# Altium PCB fpga_board.PcbDoc (part 1 of 2)
Units mm, origin at the board's own origin, x right, y up, seen from the top; angles counter-clockwise.
Board outline 101.98 x 59.94 mm, 4 copper layers (Top Layer, Int1 (GND), Int2 (PWR), Bottom Layer), stack 1.565 mm thick; 79 components, 84 nets, 394 pads, 144 vias.
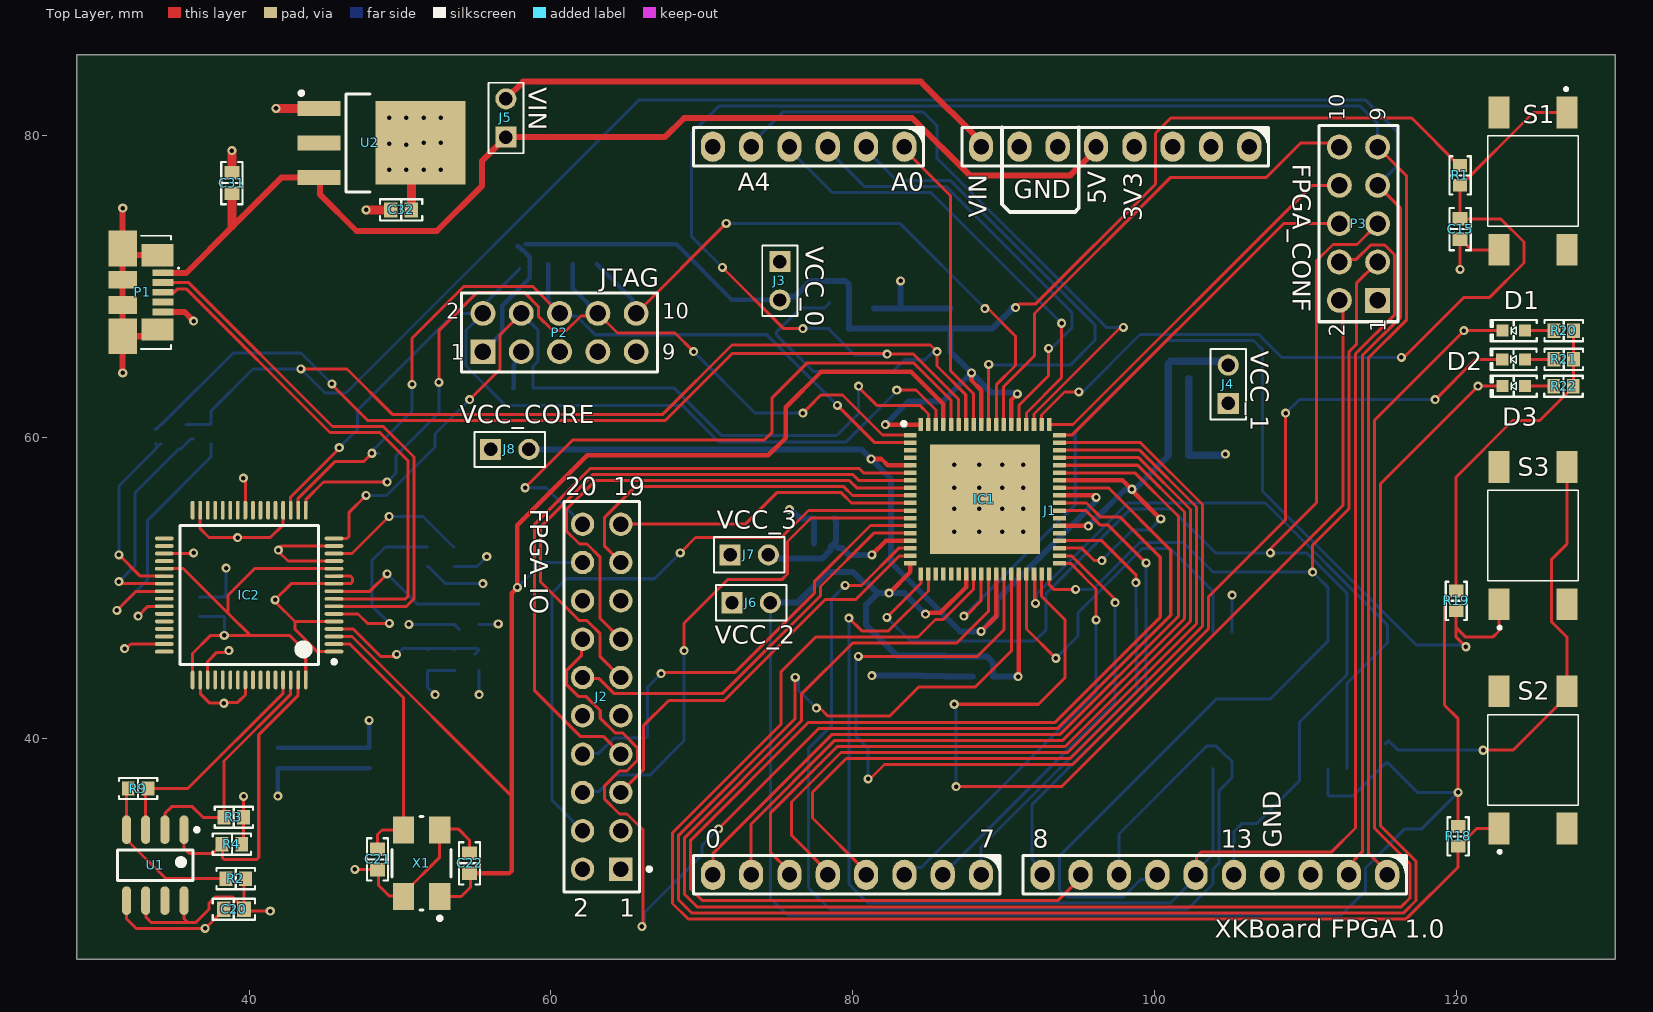
[diagram p0: Top Layer view]
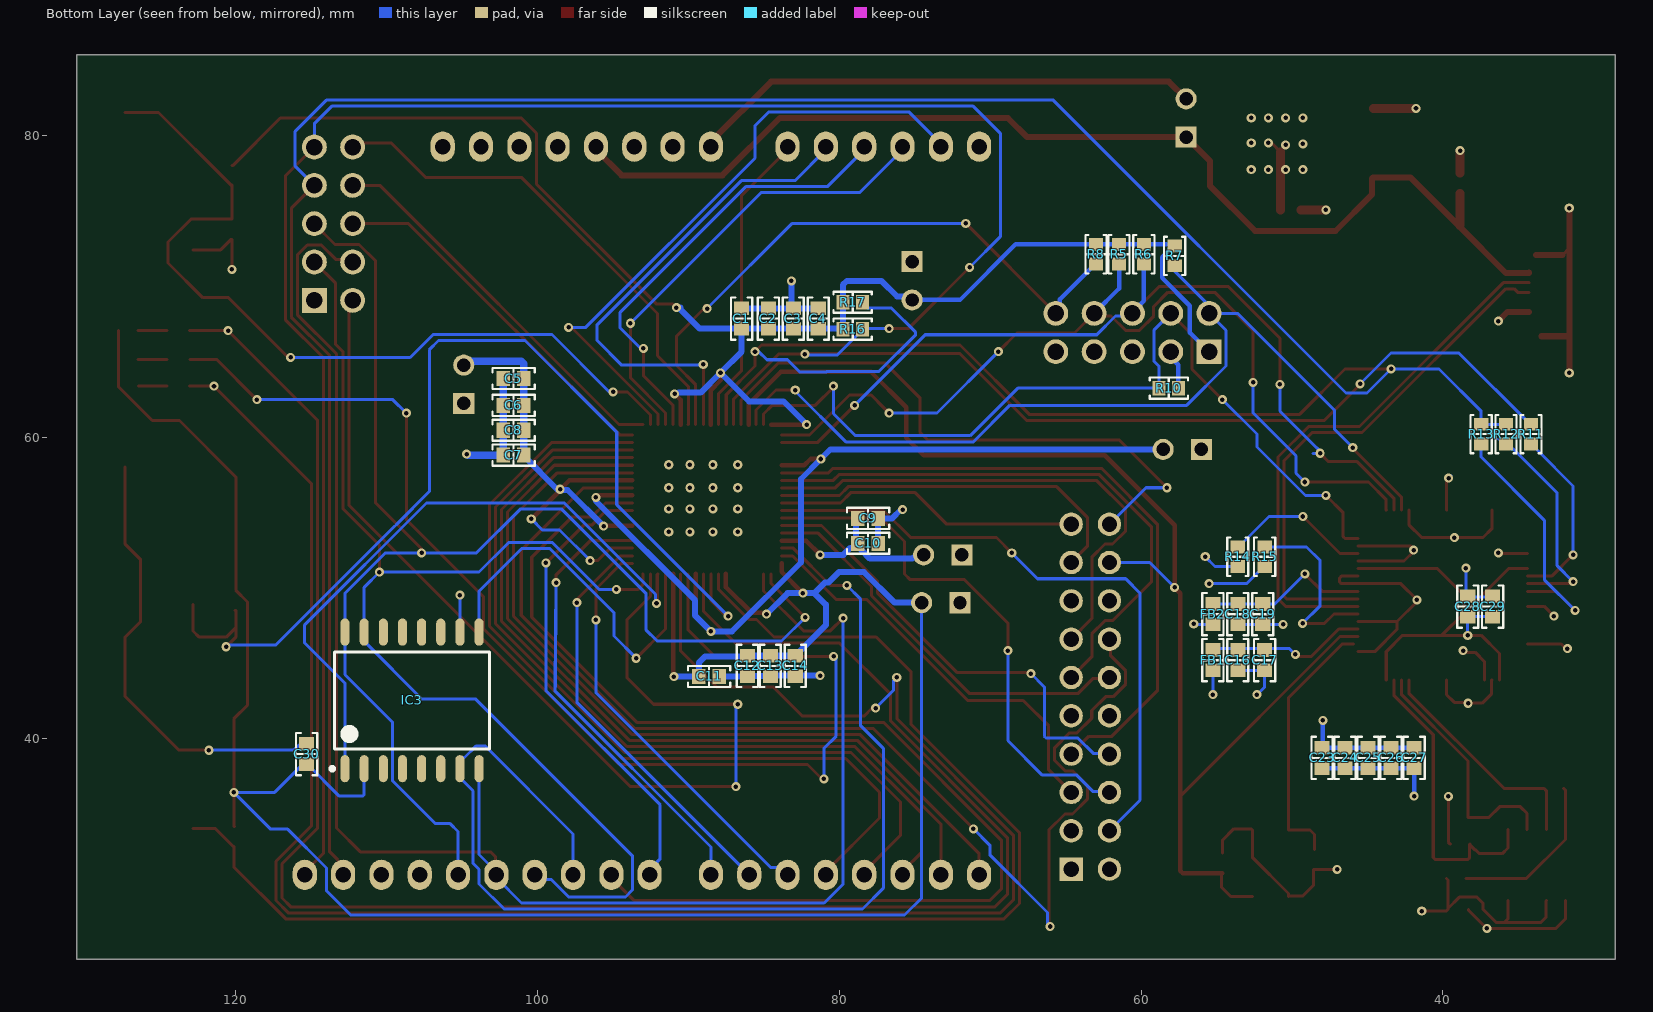
[diagram p1: Bottom Layer view, seen from below]
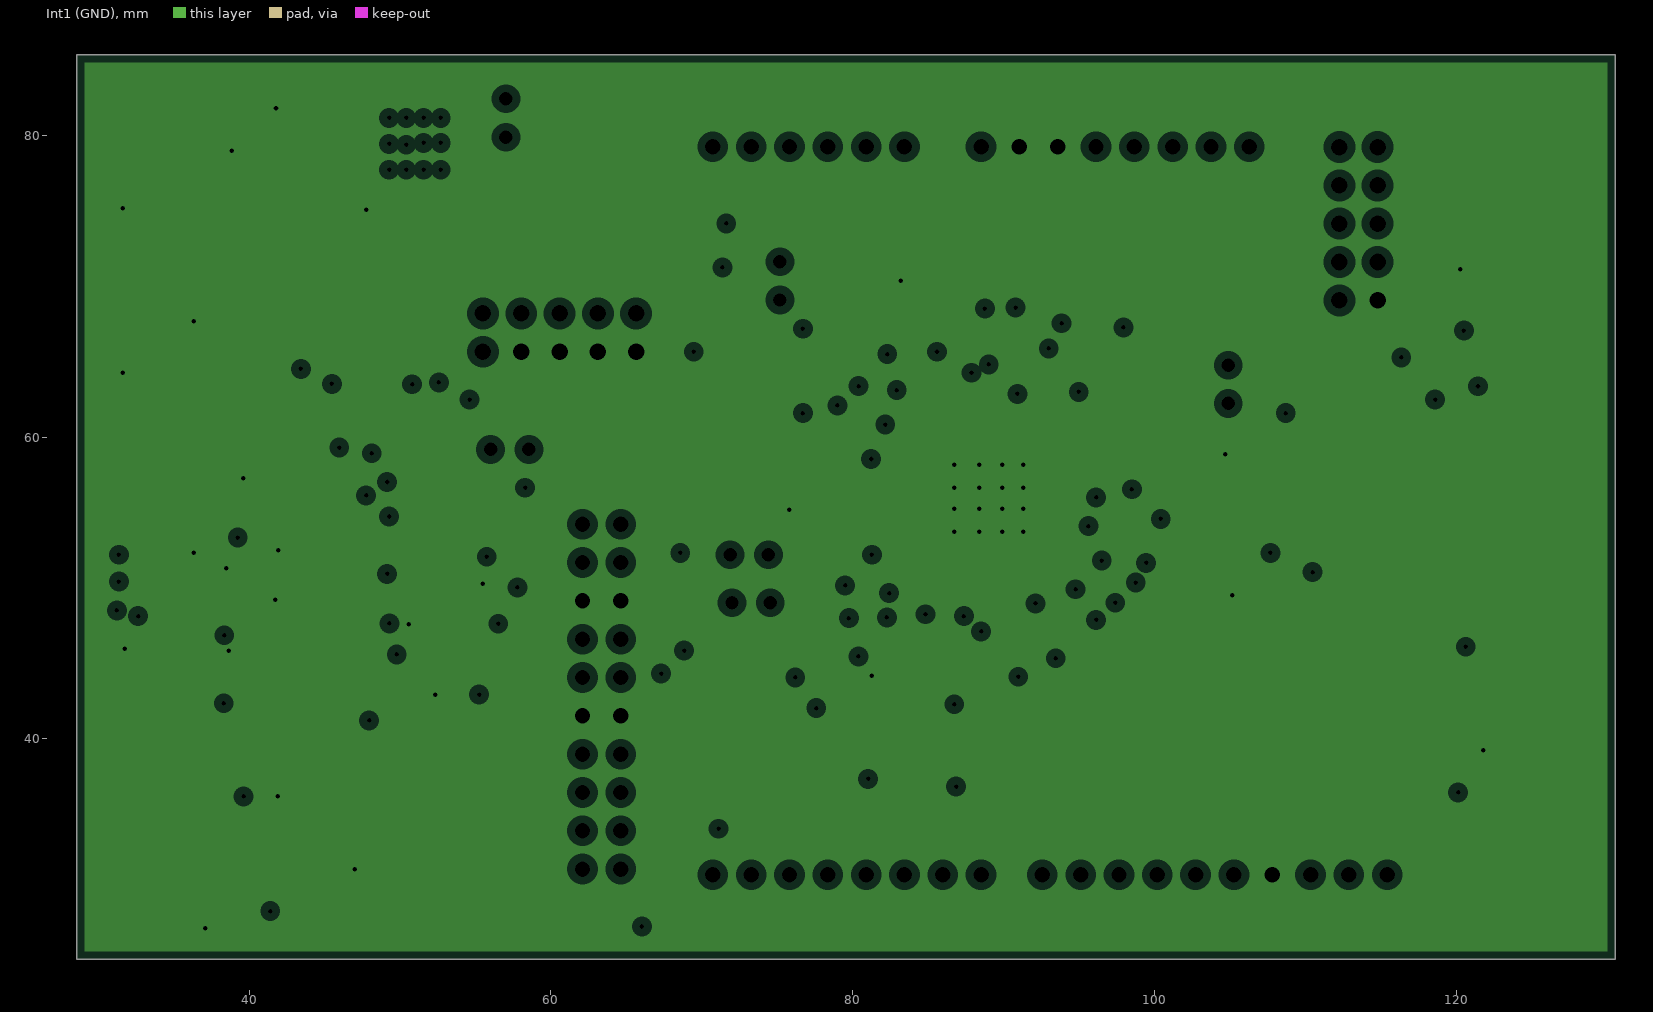
[diagram p2: Int1 (GND), clearances drawn from the general rule]
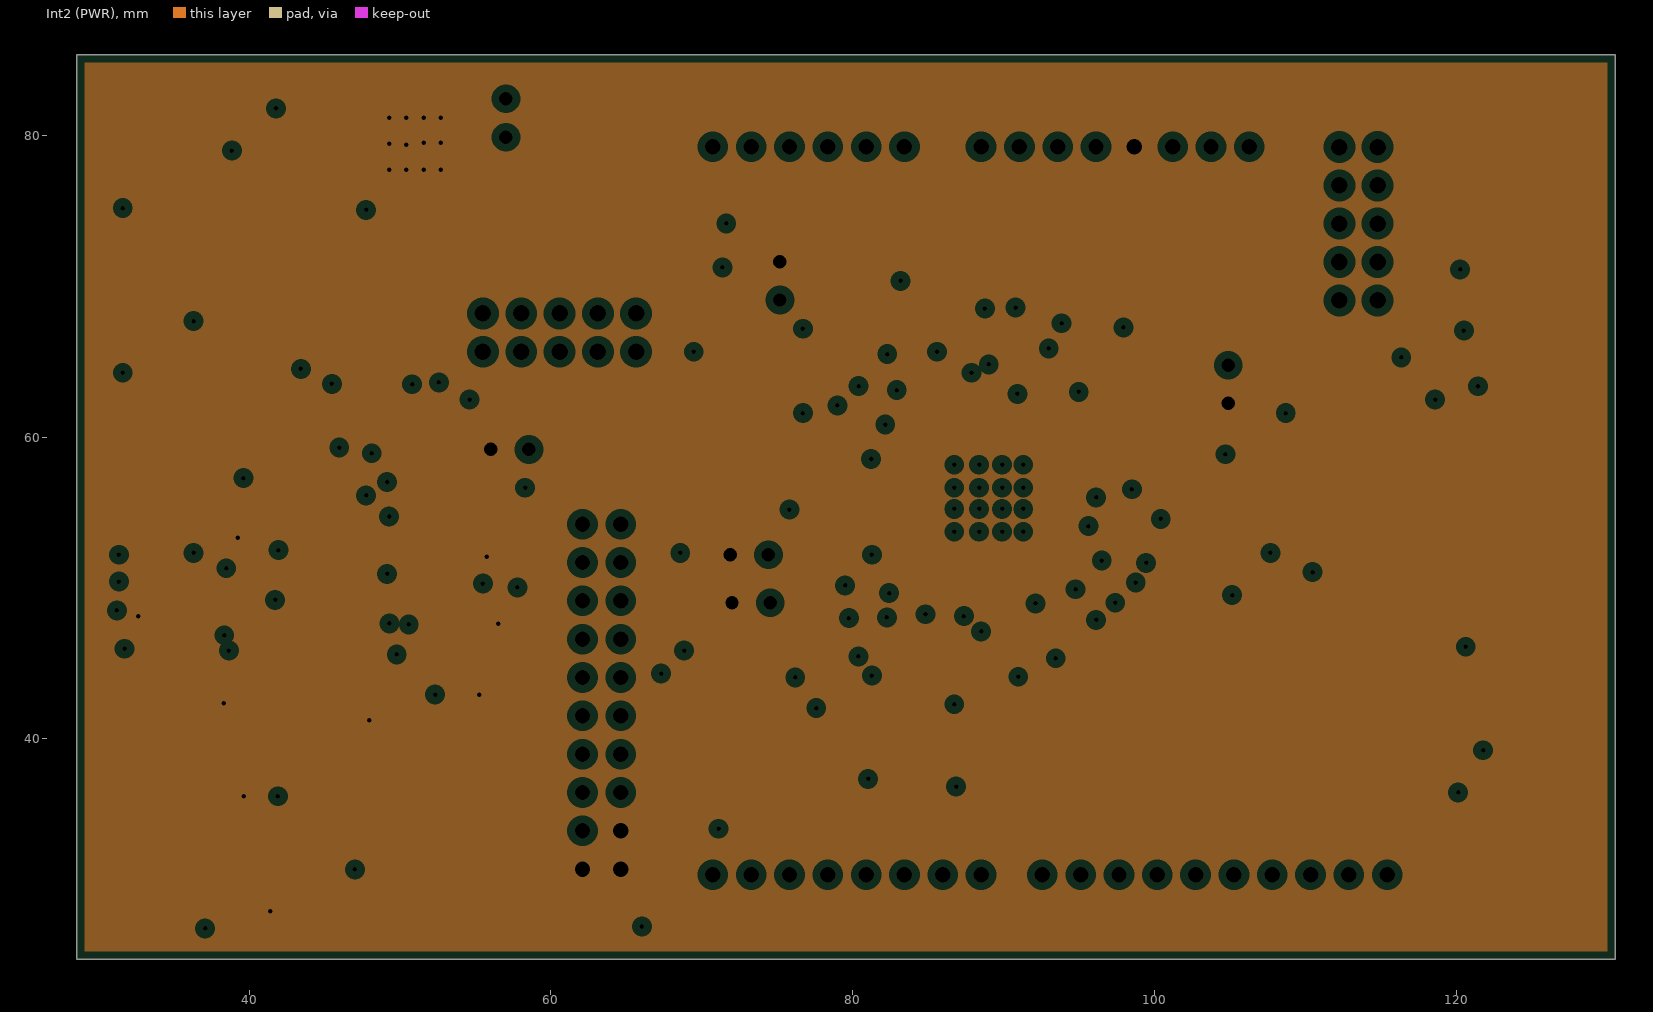
[diagram p3: Int2 (PWR), clearances drawn from the general rule]

## Layer stack, top to bottom
Top Solder: solder mask 0.0254, SM-001, Dk 4
Top Layer: signal copper 0.018
Dielectric 1: prepreg 0.1295, PP-017, Dk 4.3
Int1 (GND): plane copper 0.035, net GND
Dielectric 3: core 1.2, Core-039, Dk 4.8
Int2 (PWR): plane copper 0.035, net 3V3
Dielectric 5: prepreg 0.1295, PP-017, Dk 4.3
Bottom Layer: signal copper 0.018
Bottom Solder: solder mask 0.0254, SM-001, Dk 4

## Board outline
28.575,25.4 130.556,25.4 130.556,85.344 28.575,85.344

## Design rules (kind name [scope] priority, off if disabled: settings)
Clearance [All] p1: gap=0.2 ignorepadtopadclearanceinfootprint=FALSE
PlaneClearance [All] p1: clearance=0.508
PlaneConnect [All] p1: planeconnectstyle=Relief reliefexpansion=0.508 reliefentries=4 reliefconductorwidth=0.254 reliefairgap=0.254
PolygonConnect [All] p1: connectstyle=Relief reliefconductorwidth=0.254 reliefentries=4 polygonreliefangle="90 Angle" airgapwidth=0.254
RoutingVias [All] p1: holewidth=0.2 width=0.4 viastyle="Through Hole" minholewidth=0.2 minwidth=0.4 maxholewidth=0.3 maxwidth=0.6
SolderMaskExpansion [All] p1: expansion=0.102 istentingtop=FALSE
Width [All] p1: maxlimit=10 minlimit=0.2 preferedwidth=0.2 minimp=50.000000 maximp=50.000000 favimp=50.000000
28 further rules are at their usual default settings.

## Classes and differential pairs
component class POWER: C31 C32 J3 J4 J5 J6 J7 J8 U2
component class PERIPHERALS: C30 D1 D2 D3 IC3 R18 R19 R20 R21 R22 S2 S3
component class HEADERS: J2 P3 R16 R17
component class FPGA_CORE: C1 C2 C3 C4 C5 C6 C7 C8 C9 C10 C11 C12 C13 C14 C15 IC1 R1 S1
component class CONFIG: C16 C17 C18 C19 C20 C21 C22 C23 C24 C25 C26 C27 C28 C29 FB1 FB2 IC2 P2 R2 R3 R4 R5 R6 R7 R8 R9 R10 R11 R12 R13 R14 R15 U1 X1

## Components (designator, comment, footprint, x,y, rotation, side; value= is the part's Value field where it differs from the comment)
C1 "0.1µF" "CAP 0603_1608" 86.487,67.858 r270 bottom
C2 "0.1µF" "CAP 0603_1608" 84.709,67.858 r270 bottom
C3 "0.1µF" "CAP 0603_1608" 83.058,67.858 r270 bottom
C4 "0.1µF" "CAP 0603_1608" 81.407,67.858 r270 bottom
C5 "0.1µF" "CAP 0603_1608" 101.6,63.881 r180 bottom
C6 "0.1µF" "CAP 0603_1608" 101.6,62.103 r180 bottom
C7 "0.1µF" "CAP 0603_1608" 101.6,58.801 r180 bottom
C8 "0.1µF" "CAP 0603_1608" 101.6,60.452 r180 bottom
C9 "0.1µF" "CAP 0603_1608" 78.105,54.61 r0 bottom
C10 "0.1µF" "CAP 0603_1608" 78.105,52.959 r0 bottom
C11 "0.1µF" "CAP 0603_1608" 88.646,44.131 r0 bottom
C12 "0.1µF" "CAP 0603_1608" 86.106,44.831 r90 bottom
C13 "0.1µF" "CAP 0603_1608" 84.582,44.831 r90 bottom
C14 "0.1µF" "CAP 0603_1608" 82.931,44.831 r90 bottom
C15 "0.1µF" "CAP 0603_1608" 120.269,73.787 r90 top
C16 "4.7µF" "CAP 0603_1608" 53.594,45.212 r90 bottom
C17 "0.1µF" "CAP 0603_1608" 51.816,45.212 r90 bottom
C18 "4.7µF" "CAP 0603_1608" 53.594,48.26 r90 bottom
C19 "0.1µF" "CAP 0603_1608" 51.943,48.26 r90 bottom
C20 "0.1µF" "CAP 0603_1608" 38.989,28.702 r180 top
C21 "18pF" "CAP 0603_1608" 48.514,32.004 r90 top
C22 "18pF" "CAP 0603_1608" 54.61,31.75 r270 top
C23 "0.1µF" "CAP 0603_1608" 48.006,38.735 r90 bottom
C24 "0.1µF" "CAP 0603_1608" 46.482,38.735 r90 bottom
C25 "0.1µF" "CAP 0603_1608" 44.958,38.735 r90 bottom
C26 "0.1µF" "CAP 0603_1608" 43.434,38.735 r90 bottom
C27 "0.01µF" "CAP 0603_1608" 41.91,38.735 r90 bottom
C28 "10µF" "CAP 0603_1608" 38.354,48.768 r270 bottom
C29 "0.1µF" "CAP 0603_1608" 36.703,48.768 r270 bottom
C30 "0.1µF" "CAP 0603_1608" 115.316,38.989 r270 bottom
C31 "10µF" "CAP 0603_1608" 38.862,76.835 r270 top
C32 "10µF" "CAP 0603_1608" 50.078,75.057 r180 top
D1 "Blue" "LED 0603_1608 BLUE" 123.825,67.056 r180 top
D2 "Blue" "LED 0603_1608 BLUE" 123.813,65.151 r180 top
D3 "Blue" "LED 0603_1608 BLUE" 123.825,63.373 r180 top
FB1 "600 Ohms @ 100MHz" "FER 0603_1608" 55.245,45.212 r90 bottom
FB2 "600 Ohms @ 100MHz" "FER 0603_1608" 55.245,48.26 r90 bottom
IC1 "LCMXO3D-9400HC-6SG72C" QFN50P1000X1000X90-73N-D 88.777,55.883 r0 top
IC2 "FT2232HL" FTDI-LQFP-64_L 40.005,49.53 r180 top
IC3 "S25FL128SAGMFI011" SPSN-SOIC-16_L 108.331,42.545 r90 bottom
J1 "920-0088-01" "SCHMARTBOARD - 920-0088-01" 93.089,55.118 r270 top locked
J2 "2x10 hd." SLIN-PPPC102LFBN-RC_V 63.373,42.795 r90 top
J3 "103185-2" TE_103185-2 75.184,70.358 r270 top
J4 "103185-2" TE_103185-2 104.902,63.5 r90 top
J5 "103185-2" TE_103185-2 57.023,81.153 r90 top
J6 "103185-2" TE_103185-2 73.279,49.022 r0 top
J7 "103185-2" TE_103185-2 73.152,52.197 r0 top
J8 "103185-2" TE_103185-2 57.277,59.182 r0 top
P1 "47346-0001" MOLEX_47346-0001 31.623,69.596 r270 top
P2 "61301021121" 61301021121 60.579,66.929 r0 top
P3 "61301021121" 61301021121 113.538,74.145 r90 top
R1 "10K Ohms" "RES 0603_1608" 120.269,77.343 r90 top
R2 "10k" "RES 0603_1608" 39.116,30.734 r0 top
R3 "10k" "RES 0603_1608" 38.989,34.798 r0 top
R4 "10k" "RES 0603_1608" 38.862,33.02 r0 top
R5 "4.7k" "RES 0603_1608" 61.468,72.121 r90 bottom
R6 "4.7k" "RES 0603_1608" 59.817,72.121 r90 bottom
R7 "4.7k" "RES 0603_1608" 57.785,72.009 r90 bottom
R8 "4.7k" "RES 0603_1608" 62.992,72.121 r90 bottom
R9 "12 kOhms" "RES 0603_1608" 32.639,36.703 r0 top
R10 "2.2k" "RES 0603_1608" 58.166,63.246 r0 bottom
R11 "0" "RES 0603_1608" 34.163,60.198 r90 bottom
R12 "0" "RES 0603_1608" 35.814,60.198 r90 bottom
R13 "0" "RES 0603_1608" 37.465,60.198 r90 bottom
R14 "2.2 kOhms" "RES 0603_1608" 53.594,52.07 r90 bottom
R15 "12 kOhms" "RES 0603_1608" 51.816,52.07 r90 bottom
R16 "2 k" "RES 0603_1608" 79.121,67.158 r0 bottom
R17 "2 k" "RES 0603_1608" 79.121,68.936 r0 bottom
R18 "10K Ohms" "RES 0603_1608" 120.142,33.528 r90 top
R19 "10K Ohms" "RES 0603_1608" 120.015,49.149 r90 top
R20 "470 Ohms" "RES 0603_1608" 127.142,67.056 r180 top
R21 "470 Ohms" "RES 0603_1608" 127.142,65.151 r180 top
R22 "470 Ohms" "RES 0603_1608" 127.127,63.373 r180 top
S1 "LL3301NF065QG" LL3301NF065QG 125.095,76.962 r270 top
S2 "LL3301NF065QG" LL3301NF065QG 125.095,38.608 r90 top
S3 "LL3301NF065QG" LL3301NF065QG 125.095,53.467 r90 top
U1 "93LC56C-I/SN" SOIC-SN8_L 33.782,31.623 r270 top
U2 "NCP1117DT33T5G" TO229P990X238-4N 48.768,79.502 r0 top
X1 "12MHz" ABRA-ABMM2-4_V 51.435,31.75 r90 top

## Footprints (in the part's own frame and the unit in brackets; to place one, negate y for a bottom-side part, rotate by r counter-clockwise, add the part's x,y. Pads: shape width x height; smd on the part's side, far side on the other; paste and mask are expansions set on the pad)
61301021121 [mm] "Pin Header, pitch 2.54 mm, THT, Vertical, dual row, 10p"
  rect 1.65x1.65 hole 1.1: 1(-5.08,-1.27)
  round 1.65 hole 1.1: 2(-5.08,1.27) 3(-2.54,-1.27) 4(-2.54,1.27) 5(0,-1.27) 6(0,1.27) 7(2.54,-1.27) 8(2.54,1.27) 9(5.08,-1.27) 10(5.08,1.27)
  silkscreen extent -6.5,-2.62 6.5,2.62, body extent -6.35,-2.54 6.35,2.54, height 8.59
ABRA-ABMM2-4_V [mm] "SMD, 4-Leads, Body 6.2x3.9mm, Pitch 4.4mm, Height 1.2mm"
  rect 1.8x1.4 smd: 1(-2.2,-1.2) 2(2.2,-1.2) 3(2.2,1.2) 4(-2.2,1.2)
  silkscreen extent -3.77,-1.95 3.1,1.95, body extent -3.1,-1.95 3.1,1.95, height 1.2
"CAP 0603_1608" [mm] "Chip Capacitor, 2-Leads, Body 1.60x0.80mm, IPC Medium Density"
  rect 0.9x1 smd: 1(-0.675,0) 2(0.675,0)
  silkscreen extent -1.4,-0.7 1.4,0.7, body extent -0.8,-0.41 0.8,0.41, height 0.82
"FER 0603_1608" [mm] "Chip Ferrite, 2-Leads, Body 1.60x0.80mm, IPC Medium Density"
  rect 0.9x1 smd: 1(-0.675,0) 2(0.675,0)
  silkscreen extent -1.4,-0.7 1.4,0.7, body extent -0.8,-0.41 0.8,0.41, height 0.82
FTDI-LQFP-64_L [mm] "QFP, 64-Leads, Body 10.00x10.00mm, Pitch 0.50mm, IPC High Density"
  oval 1.25x0.25 smd: 1(-5.625,3.75) 2(-5.625,3.25) 3(-5.625,2.75) 4(-5.625,2.25) 5(-5.625,1.75) 6(-5.625,1.25) 7(-5.625,0.75) 8(-5.625,0.25) 9(-5.625,-0.25) 10(-5.625,-0.75) 11(-5.625,-1.25) 12(-5.625,-1.75) 13(-5.625,-2.25) 14(-5.625,-2.75) 15(-5.625,-3.25) 16(-5.625,-3.75) 33(5.625,-3.75) 34(5.625,-3.25) 35(5.625,-2.75) 36(5.625,-2.25) 37(5.625,-1.75) 38(5.625,-1.25) 39(5.625,-0.75) 40(5.625,-0.25) 41(5.625,0.25) 42(5.625,0.75) 43(5.625,1.25) 44(5.625,1.75) 45(5.625,2.25) 46(5.625,2.75) 47(5.625,3.25) 48(5.625,3.75)
  oval 0.25x1.25 smd: 17(-3.75,-5.625) 18(-3.25,-5.625) 19(-2.75,-5.625) 20(-2.25,-5.625) 21(-1.75,-5.625) 22(-1.25,-5.625) 23(-0.75,-5.625) 24(-0.25,-5.625) 25(0.25,-5.625) 26(0.75,-5.625) 27(1.25,-5.625) 28(1.75,-5.625) 29(2.25,-5.625) 30(2.75,-5.625) 31(3.25,-5.625) 32(3.75,-5.625) 49(3.75,5.625) 50(3.25,5.625) 51(2.75,5.625) 52(2.25,5.625) 53(1.75,5.625) 54(1.25,5.625) 55(0.75,5.625) 56(0.25,5.625) 57(-0.25,5.625) 58(-0.75,5.625) 59(-1.25,5.625) 60(-1.75,5.625) 61(-2.25,5.625) 62(-2.75,5.625) 63(-3.25,5.625) 64(-3.75,5.625)
  silkscreen extent -5.75,-4.6 4.6,4.6, body extent -6,-6 6,6, height 1.6
"LED 0603_1608 BLUE" [mm] "Chip Diode, 2-Leads, Body 1.60x0.80mm, IPC Medium Density"
  rect 0.8x0.8 smd: 1(-0.75,0) 2(0.75,0)
  silkscreen extent -1.52,-0.7 1.52,0.7, body extent -0.8,-0.4 0.8,0.4, height 0.53
LL3301NF065QG [mm]
  rect 2.1x1.4 smd: 1(-4.55,2.25) 2(4.55,2.25) 3(-4.55,-2.25) 4(4.55,-2.25)
  silkscreen extent -6.2,-3 3,3
MOLEX_47346-0001 [mm]
  rect 0.45x1.38 smd: 1(-1.3,2.66) 2(-0.65,2.66) 3(0,2.66) 4(0.65,2.66) 5(1.3,2.66)
  rect 1.475x2.1 smd: SH1(-2.462,2.3) SH2(2.462,2.3)
  rect 2.375x1.9 smd: SH3(-2.913,0) SH6(2.913,0)
  rect 1.175x1.9 smd: SH4(-0.837,0) SH5(0.837,0)
  silkscreen extent -3.75,1.2 3.75,3.75, body extent -4.18,-2.93 4.18,2.5, height 2.7
QFN50P1000X1000X90-73N-D [mm]
  rect 0.85x0.3 smd: 1(-4.95,4.25) 2(-4.95,3.75) 3(-4.95,3.25) 4(-4.95,2.75) 5(-4.95,2.25) 6(-4.95,1.75) 7(-4.95,1.25) 8(-4.95,0.75) 9(-4.95,0.25) 10(-4.95,-0.25) 11(-4.95,-0.75) 12(-4.95,-1.25) 13(-4.95,-1.75) 14(-4.95,-2.25) 15(-4.95,-2.75) 16(-4.95,-3.25) 17(-4.95,-3.75) 18(-4.95,-4.25) 37(4.95,-4.25) 38(4.95,-3.75) 39(4.95,-3.25) 40(4.95,-2.75) 41(4.95,-2.25) 42(4.95,-1.75) 43(4.95,-1.25) 44(4.95,-0.75) 45(4.95,-0.25) 46(4.95,0.25) 47(4.95,0.75) 48(4.95,1.25) 49(4.95,1.75) 50(4.95,2.25) 51(4.95,2.75) 52(4.95,3.25) 53(4.95,3.75) 54(4.95,4.25)
  rect 0.3x0.85 smd: 19(-4.25,-4.95) 20(-3.75,-4.95) 21(-3.25,-4.95) 22(-2.75,-4.95) 23(-2.25,-4.95) 24(-1.75,-4.95) 25(-1.25,-4.95) 26(-0.75,-4.95) 27(-0.25,-4.95) 28(0.25,-4.95) 29(0.75,-4.95) 30(1.25,-4.95) 31(1.75,-4.95) 32(2.25,-4.95) 33(2.75,-4.95) 34(3.25,-4.95) 35(3.75,-4.95) 36(4.25,-4.95) 55(4.25,4.95) 56(3.75,4.95) 57(3.25,4.95) 58(2.75,4.95) 59(2.25,4.95) 60(1.75,4.95) 61(1.25,4.95) 62(0.75,4.95) 63(0.25,4.95) 64(-0.25,4.95) 65(-0.75,4.95) 66(-1.25,4.95) 67(-1.75,4.95) 68(-2.25,4.95) 69(-2.75,4.95) 70(-3.25,4.95) 71(-3.75,4.95) 72(-4.25,4.95)
  rect 7.278x7.278 smd: 73(0,0)
  silkscreen extent -5.5,4.88 -5.25,5.12, body extent -5.05,-5.05 5.05,5.05, height 0.9
"RES 0603_1608" [mm] "Chip Resistor, 2-Leads, Body 1.60x0.80mm, IPC Medium Density"
  rect 0.85x0.95 smd: 1(-0.65,0) 2(0.65,0)
  silkscreen extent -1.27,-0.7 1.27,0.7, body extent -0.8,-0.4 0.8,0.4, height 0.45
"SCHMARTBOARD - 920-0088-01" [mm] "Arduino pin header set"
  oval 2x1.6 hole 1.02: 1(-24.13,13.21) 2(-24.13,10.67) 3(-24.13,8.13) 4(-24.13,5.59) 5(-24.13,3.05) 6(-24.13,0.51) 7(-24.13,-2.03) 8(-24.13,-4.57) 9(-24.13,-9.65) 10(-24.13,-12.19) 11(-24.13,-14.73) 12(-24.13,-17.27) 13(-24.13,-19.81) 14(-24.13,-22.35) 15(24.13,-22.35) 16(24.13,-19.81) 17(24.13,-17.27) 18(24.13,-14.73) 19(24.13,-12.19) 20(24.13,-9.65) 21(24.13,-7.11) 22(24.13,-4.57) 23(24.13,-0.51) 24(24.13,2.03) 25(24.13,4.57) 26(24.13,7.11) 27(24.13,9.65) 28(24.13,12.19) 29(24.13,14.73) 30(24.13,17.27) 31(24.13,19.81) 32(24.13,22.35)
  silkscreen extent -25.4,-23.62 25.4,23.62, body extent -25.4,-23.62 25.4,23.62, height 8.5
SLIN-PPPC102LFBN-RC_V [mm] "THD, 20-Leads, Body 25.9x5mm, Pitch 2.54mm"
  rect 1.55x1.55 hole 1.02: 1(-11.43,-1.27)
  round 1.55 hole 1.02: 2(-11.43,1.27) 3(-8.89,-1.27) 4(-8.89,1.27) 5(-6.35,-1.27) 6(-6.35,1.27) 7(-3.81,-1.27) 8(-3.81,1.27) 9(-1.27,-1.27) 10(-1.27,1.27) 11(1.27,-1.27) 12(1.27,1.27) 13(3.81,-1.27) 14(3.81,1.27) 15(6.35,-1.27) 16(6.35,1.27) 17(8.89,-1.27) 18(8.89,1.27) 19(11.43,-1.27) 20(11.43,1.27)
  silkscreen extent -12.95,-3.27 12.95,2.5, body extent -12.95,-2.5 12.95,2.5, height 8.75
SOIC-SN8_L [mm] "SOIC, 8-Leads, Body 4.9x3.9mm, Pitch 1.27mm, IPC High Density"
  oval 1.9x0.6 smd: 1(-2.35,1.905) 2(-2.35,0.635) 3(-2.35,-0.635) 4(-2.35,-1.905) 5(2.35,-1.905) 6(2.35,-0.635) 7(2.35,0.635) 8(2.35,1.905)
  silkscreen extent -2.47,-2.5 1,2.88, body extent -2,-2.5 2,2.5, height 1.75
SPSN-SOIC-16_L [mm] "SOIC, 16-Leads, Body 10.3x7.5mm, Pitch 1.27mm, IPC High Density"
  oval 1.8x0.6 smd: 1(-4.525,4.445) 2(-4.525,3.175) 3(-4.525,1.905) 4(-4.525,0.635) 5(-4.525,-0.635) 6(-4.525,-1.905) 7(-4.525,-3.175) 8(-4.525,-4.445) 9(4.525,-4.445) 10(4.525,-3.175) 11(4.525,-1.905) 12(4.525,-0.635) 13(4.525,0.635) 14(4.525,1.905) 15(4.525,3.175) 16(4.525,4.445)
  silkscreen extent -4.65,-5.15 3.22,5.42, body extent -3.75,-5.15 3.75,5.15, height 2.65
TE_103185-2 [mm]
  rect 1.398x1.398 hole 0.89: 1(-1.27,0)
  round 1.398 hole 0.89: 2(1.27,0)
  silkscreen extent -2.34,-1.17 2.34,1.17
TO229P990X238-4N [mm]
  rect 2.85x1 smd: 1(-4.15,2.29) 2(-4.15,0) 3(-4.15,-2.29)
  rect 5.95x5.55 smd: 4(2.6,0)
  silkscreen extent -5.42,-3.25 -0.75,3.42

## Part data
C1 C2 C3 C4 C5 C6 C7 C8 C9 C10 C11 C12 C13 C14 C15: library part CS0603KRX7R7BB104, "CAP CER 0.1UF 16V X7R 0603", Device Package="0603 (1608 Metric)", Manufacturer=Yageo, Operating Temperature="-55°C ~ 125°C", Supplier Part Number 1=311-3560-1-ND, Temperature Coefficient=X7R, Tolerance=±10%, Voltage - Rated=16V, Applications="Boardflex Sensitive", Capacitance=0.1µF, ComponentLink1Description=Datasheet, ComponentLink1URL=http://www.yageo.com/NewPortal/yageodocoutput?fileName=/pdf/MLCC/UPY-ST_NPOX7R_16V-to-3KV_5.pdf, ComponentLink2Description="DigiKey Link", ComponentLink2URL=http://digikey.com/product-detail/en/yageo/CS0603KRX7R7BB104/311-3560-1-ND/7648487, Features="Soft Termination", LastUpdated="02.09.2020 1:03:36", Lifecycle Status=Active, Minimum Order=1, Mounting Type="Surface Mount, MLCC", Package / Case="0603 (1608 Metric)", Packaging=TapeAndReel, Part Number=CS0603KRX7R7BB104, Part Status=Active, PartId=2286, Price=0.02, Series=CS, Size / Dimension="0.063\" L x 0.031\" W (1.60mm x 0.80mm)", Supplier 1=DigiKey, Thickness (Max)="0.037\" (0.95mm)"
C16 C18: library part LMK107BJ475KA-T, "CAP CER 4.7UF 10V X5R 0603", Device Package="0603 (1608 Metric)", Manufacturer="Taiyo Yuden", Operating Temperature="-55°C ~ 85°C", Supplier Part Number 1=587-1441-1-ND, Temperature Coefficient=X5R, Tolerance=±10%, Voltage - Rated=10V, Applications="General Purpose", Capacitance=4.7µF, ComponentLink1Description=Datasheet, ComponentLink1URL="https://ds.yuden.co.jp/TYCOMPAS/ut/detail?pn=LMK107BJ475KA-T  &u=M", ComponentLink2Description="DigiKey Link", ComponentLink2URL=http://digikey.com/product-detail/en/taiyo-yuden/LMK107BJ475KA-T/587-1441-1-ND/1004072, LastUpdated="02.09.2020 1:03:36", Lifecycle Status=Active, Minimum Order=1, Mounting Type="Surface Mount, MLCC", Package / Case="0603 (1608 Metric)", Packaging=TapeAndReel, Part Number=LMK107BJ475KA-T, Part Status=Active, PartId=2244, Price=0.03, Series=M, Size / Dimension="0.063\" L x 0.031\" W (1.60mm x 0.80mm)", Supplier 1=DigiKey, Thickness (Max)="0.035\" (0.90mm)"
C17 C19 C20 C23 C24 C25 C26 C29 C30: library part C0603C104K5RAC7411, "CAP CER 0.1UF 50V X7R 0603", Device Package="0603 (1608 Metric)", Manufacturer=KEMET, Operating Temperature="-55°C ~ 125°C", Supplier Part Number 1=399-7374-2-ND, Temperature Coefficient=X7R, Tolerance=±10%, Voltage - Rated=50V, Applications="Bypass, Decoupling", Capacitance=0.1µF, ComponentLink1Description=Datasheet, ComponentLink1URL=https://api.kemet.com/component-edge/download/datasheet/C0603C104K5RAC7411.pdf, ComponentLink2Description="DigiKey Link", ComponentLink2URL=http://digikey.com/product-detail/en/kemet/C0603C104K5RAC7411/399-7374-2-ND/3317013, LastUpdated="02.09.2020 1:03:36", Lifecycle Status=Active, Minimum Order=15000, Mounting Type="Surface Mount, MLCC", Package / Case="0603 (1608 Metric)", Packaging=TapeAndReel, Part Number=C0603C104K5RAC7411, Part Status=Active, PartId=2233, Price=0.02, Series="SMD Comm X7R", Size / Dimension="0.063\" L x 0.031\" W (1.60mm x 0.80mm)", Supplier 1=DigiKey, Thickness (Max)="0.035\" (0.90mm)"
C21 C22: library part VJ0603A180FXQCW1BC, "CAP CER 18PF 10V C0G/NP0 0603", Device Package="0603 (1608 Metric)", Manufacturer="Vishay Vitramon", Operating Temperature="-55°C ~ 125°C", Supplier Part Number 1=720-1660-1-ND, Temperature Coefficient="C0G, NP0", Tolerance=±1%, Voltage - Rated=10V, Applications="General Purpose", Capacitance=18pF, ComponentLink1Description=Datasheet, ComponentLink1URL=https://www.vishay.com/docs/28548/vjw1bcbascomseries.pdf, ComponentLink2Description="DigiKey Link", ComponentLink2URL=http://digikey.com/product-detail/en/vishay-vitramon/VJ0603A180FXQCW1BC/720-1660-1-ND/8324080, LastUpdated="02.09.2020 1:03:27", Lifecycle Status=Active, Minimum Order=1, Mounting Type="Surface Mount, MLCC", Package / Case="0603 (1608 Metric)", Packaging=TapeAndReel, Part Number=VJ0603A180FXQCW1BC, Part Status=Active, PartId=7094, Price=0.04, Series=VJ, Size / Dimension="0.063\" L x 0.031\" W (1.60mm x 0.80mm)", Supplier 1=DigiKey, Thickness (Max)="0.034\" (0.87mm)"
C27: library part C0603C103KARACAUTO, "CAP CER 0.01UF 250V X7R 0603", Device Package="0603 (1608 Metric)", Manufacturer=KEMET, Operating Temperature="-55°C ~ 125°C", Ratings=AEC-Q200, Supplier Part Number 1=399-17960-1-ND, Temperature Coefficient=X7R, Tolerance=±10%, Voltage - Rated=250V, Applications="Automotive, Bypass, Decoupling", Capacitance=0.01µF, ComponentLink1Description=Datasheet, ComponentLink1URL=https://api.kemet.com/component-edge/download/datasheet/C0603C103KARACAUTO.pdf, ComponentLink2Description="DigiKey Link", ComponentLink2URL=http://digikey.com/product-detail/en/kemet/C0603C103KARACAUTO/399-17960-1-ND/9084030, LastUpdated="02.09.2020 1:03:10", Lifecycle Status=Active, Minimum Order=1, Mounting Type="Surface Mount, MLCC", Package / Case="0603 (1608 Metric)", Packaging=TapeAndReel, Part Number=C0603C103KARACAUTO, Part Status=Active, PartId=15195, Price=0.25, Series="SMD Auto X7R", Size / Dimension="0.063\" L x 0.031\" W (1.60mm x 0.80mm)", Supplier 1=DigiKey, Thickness (Max)="0.034\" (0.87mm)"
C28: library part GRM188R60J106ME47D, "CAP CER 10UF 6.3V X5R 0603", Device Package="0603 (1608 Metric)", Manufacturer="Murata Electronics", Operating Temperature="-55°C ~ 85°C", Supplier Part Number 1=490-3896-1-ND, Temperature Coefficient=X5R, Tolerance=±20%, Voltage - Rated=6.3V, Applications="General Purpose", Capacitance=10µF, ComponentLink1Description=Datasheet, ComponentLink1URL=https://www.murata.com/~/media/webrenewal/support/library/catalog/products/capacitor/mlcc/c02e.ashx?la=en-us, ComponentLink2Description="DigiKey Link", ComponentLink2URL=http://digikey.com/product-detail/en/murata-electronics/GRM188R60J106ME47D/490-3896-1-ND/965938, LastUpdated="02.09.2020 1:03:35", Lifecycle Status=Active, Minimum Order=1, Mounting Type="Surface Mount, MLCC", Package / Case="0603 (1608 Metric)", Packaging=TapeAndReel, Part Number=GRM188R60J106ME47D, Part Status=Active, PartId=2351, Price=0.03, Series=GRM, Size / Dimension="0.063\" L x 0.031\" W (1.60mm x 0.80mm)", Supplier 1=DigiKey, Thickness (Max)="0.035\" (0.90mm)"
C31 C32: library part GRT188R61C106KE13D, "CAP CER 10UF 16V X5R 0603", Device Package="0603 (1608 Metric)", Manufacturer="Murata Electronics", Operating Temperature="-55°C ~ 85°C", Ratings=AEC-Q200, Supplier Part Number 1=490-12317-1-ND, Temperature Coefficient=X5R, Tolerance=±10%, Voltage - Rated=16V, Applications=Automotive, Capacitance=10µF, ComponentLink1Description=Datasheet, ComponentLink1URL=https://search.murata.co.jp/Ceramy/image/img/A01X/G101/ENG/GRT188R61C106KE13-01.pdf, ComponentLink2Description="DigiKey Link", ComponentLink2URL=http://digikey.com/product-detail/en/murata-electronics/GRT188R61C106KE13D/490-12317-1-ND/5417018, LastUpdated="02.09.2020 1:03:11", Lifecycle Status=Active, Minimum Order=1, Mounting Type="Surface Mount, MLCC", Package / Case="0603 (1608 Metric)", Packaging=TapeAndReel, Part Number=GRT188R61C106KE13D, Part Status=Active, PartId=14922, Price=0.10, Series=GRT, Size / Dimension="0.063\" L x 0.031\" W (1.60mm x 0.80mm)", Supplier 1=DigiKey, Thickness (Max)="0.035\" (0.90mm)"
D1 D2 D3: library part VLMB1300-GS08, "LED BLUE 0603 SMD", Current - Test=20mA, Device Package="0603 (1608 Metric)", Lens Color=1.00mm, Manufacturer="Vishay Semiconductor Opto Division", Millicandela Rating=104mcd, Supplier Device Package=0603, Supplier Part Number 1=VLMB1300-GS08CT-ND, Voltage - Forward (Vf) (Typ)=3.3V, Color=Blue, ComponentLink1Description=Datasheet, ComponentLink1URL=http://www.vishay.com/docs/82437/vlmo1300.pdf, ComponentLink2Description="DigiKey Link", ComponentLink2URL=http://digikey.com/product-detail/en/vishay-semiconductor-opto-division/VLMB1300-GS08/VLMB1300-GS08CT-ND/3025485, Configuration=Standard, Height (Max)=1.00mm, LastUpdated="02.09.2020 1:20:26", Lens Size="1.10mm x 0.80mm", Lens Style="Rectangle with Flat Top", Lifecycle Status=Active, Minimum Order=1, Mounting Type="Surface Mount", Package / Case="0603 (1608 Metric)", Packaging=TapeAndReel, Part Number=VLMB1300-GS08, Part Status=Active, PartId=785, Price=0.08, Series=CHIPLED, Size / Dimension="1.60mm L x 0.80mm W", Supplier 1=DigiKey, Viewing Angle=130°, Wavelength - Dominant=470nm, Wavelength - Peak=468nm
FB1 FB2: library part BLM18AG601SN1D, "FERRITE BEAD 600 OHM 0603 1LN", Current Rating (Max)=500mA, DC Resistance (DCR) (Max)=380mOhm, Device Package="0603 (1608 Metric)", Manufacturer="Murata Electronics", Operating Temperature="-55°C ~ 125°C", Supplier Part Number 1=490-1014-1-ND, ComponentLink1Description=Datasheet, ComponentLink1URL=https://www.murata.com/en-us/products/productdata/8796738650142/ENFA0003.pdf, ComponentLink2Description="DigiKey Link", ComponentLink2URL=http://digikey.com/product-detail/en/murata-electronics/BLM18AG601SN1D/490-1014-1-ND/584462, Height (Max)="0.037\" (0.95mm)", Impedance @ Frequency="600 Ohms @ 100MHz", LastUpdated="02.09.2020 1:18:18", Lifecycle Status=Active, Minimum Order=1, Mounting Type="Surface Mount", Number of Lines=1, Package / Case="0603 (1608 Metric)", Packaging=TapeAndReel, Part Number=BLM18AG601SN1D, Part Status=Active, PartId=848, Price=0.02, Series="EMIFIL®, BLM18", Size / Dimension="0.063\" L x 0.032\" W (1.60mm x 0.80mm)", Supplier 1=DigiKey
IC1: "Integrated Circuit", Manufacturer_Name="Lattice Semiconductor", Mouser Part Number=842-O3D9400HC6SG72C, Datasheet Link=http://www.latticesemi.com/Products/FPGAandCPLD/MachXO3D, Height=0.9mm, Manufacturer_Part_Number=LCMXO3D-9400HC-6SG72C, Mouser Price/Stock=https://www.mouser.co.uk/ProductDetail/Lattice/LCMXO3D-9400HC-6SG72C?qs=P1JMDcb91o5zlo%2FfseWNjQ%3D%3D
IC2: library part CMP-2000-06287-1, "Dual High Speed USB to Multipurpose UART / FIFO IC / , 3 to 3.6 V, -40 to 85 degC, 64- Pin LQFP, RoHS", Manufacturer=FTDI, Maximum Operating Temperature=+85°C, Minimum Operating Temperature=-40°C, Package Description="64-Pin Low-profile Quad Flat Package, Body 10 x 10 mm, Pitch 0.5 mm", Package Reference=LQFP-64, Package Type=LQFP, Datasheet URL=http://www.ftdichip.com/Support/Documents/DataSheets/ICs/DS_FT2232H.pdf, Datasheet Version="Rev. 2.5, 07/2016", Dimensions=10x10x1.4mm, Height=1.4mm, Length=10mm, Manufacturer URL=http://www.nxp.com/, Maximum Data Rate=480Mbit/s, Mounting Technology=SurfaceMount, Mounting Type=SurfaceMount, Number of Channels per Chip=2, Pin Count=64, Standard Supported=RS232,RS422,RS485, Width=10mm
IC3: library part CMP-1329-00018-1, "MirrorBit Flash Non-Volatile Memory CMOS 3.0 Volt Core with Versatile I/O, Serial Peripheral Interface with Multi-I/O, 128 Mbit, 133 MHz, -40 to 85 degC, 16-Pin SO (SO3016), RoHS, Tube", Manufacturer=Spansion, Temperature Range="-40 to 85 degC", ComponentLink1Description="Manufacturer URL", ComponentLink1URL=http://www.spansion.com/Pages/Default.aspx, ComponentLink2Description=Datasheet, ComponentLink2URL=http://www.spansion.com/Support/Datasheets/S25FL128S_256S_00.pdf, ComponentLink3Description="Package Specification", ComponentLink3URL=http://www.spansion.com/Support/Datasheets/S25FL128S_256S_00.pdf, DatasheetVersion="Rev. 08", Density="128 Mbit", Mounting Technology="Surface Mount", OTP="1024 B", PackageDescription="16-Pin Wide Plastic Small Outline Package, Body 10.3 x 7.5 mm, Pitch 1.27 mm", Packing=Tube, PartNumber=S25FL128SAGMFI011, RoHS=TRUE, Speed="133 MHz", VCC="2.7 to 3.6 V"
J1: "CONN HDR 8/10P 0.1 GOLD PCB 6PC", Insulation Color=Black, Manufacturer="Schmartboard, Inc.", Supplier Part Number 1=1988-1036-ND, ComponentLink1Description=Datasheet, ComponentLink1URL=http://schmartboard.com/content/Brochures/920-0088-01.pdf, ComponentLink2Description="DigiKey Link", ComponentLink2URL=http://digikey.com/product-detail/en/schmartboard-inc/920-0088-01/1988-1036-ND/9559319, Connector Type=Header, Contact Finish - Mating=Gold, Contact Finish - Post=Gold, Contact Length - Post="0.413\" (10.50mm)", Contact Type="Female Socket", Fastening Type=Push-Pull, Insulation Height="0.335\" (8.51mm)", LastUpdated="31.01.2020 20:49:58", Lifecycle Status=Active, Minimum Order=1, Mounting Type="Through Hole", Number of Positions="6, 8, 10", Number of Positions Loaded=All, Number of Rows=1, Packaging=Bulk, Part Number=920-0088-01, Part Status=Active, Pitch - Mating="0.100\" (2.54mm)", Price=5.00, Series=-, Style="Board to Board", Supplier 1=DigiKey, Termination=Solder
J2: library part CMP-1770-00003-1, "Female Header, Pitch 2.54 mm, 2 x 10 Position, Height 8.75 mm, Tail Length 3.2 mm, -40 to 105 degC, RoHS, Bulk", Case\Package=SOIC, Frequency="100 KHz", Max Operating Temperature="70 degC", Max Ouput Current="-200 mA", Max Supply Voltage="16 V", Min Operating Temperature="0 degC", Min Supply Voltage="4.5 V", Package Quantity=2500, ComponentLink1Description=Datasheet, ComponentLink1URL=http://datasheet.octopart.com/PPPC102LFBN-RC-Sullins-datasheet-8327184.pdf, DatasheetVersion="Rev. D, 10/2007", Height="1.58 mm", Length="4.9 mm", Mount="Surface Mount", PackageDescription="Female Header, Pitch 2.54 mm, 2 x 10 Position, Height 8.75 mm, Tail Length 3.2 mm", PackageReference=PPPC102LFBN-RC, Packaging="Tape and Reel", Pins=8, Radiation Hardening=No, REACH SVHC="No SVHC", RoHSCompliant=true, Weight="0.002561 oz", Width="3.91 mm"
J3 J4 J5 J6 J7 J8: "02 MODII HDR SRST B/A .100CL", Package=None, Availability=Unavailable, MP=103185-2, Price=None
P1: "CONN RCPT 5POS MICRO USB R/A  SMD", Supplier Part Number 1=1568026, Supplier 1=Farnell, Supplier 2=Mouser, Supplier Part Number 2=538-47346-0001
P2 P3: library part CMP-1502-01084-1, "THT Vertical Pin Header WR-PHD, Pitch 2.54 mm, Dual Row, 10 pins", Contact Resistance=20mOhm, Manufacturer="Wurth Elektronik", Operating Temperature=-40to105degC, Rated Current=3A, Withstanding Voltage=500VAC, Working Voltage=250VAC, Datasheet URL=https://katalog.we-online.de/em/datasheet/6130xx21121.pdf, Gender=Male, Manufacturer URL=http://www.we-online.de, Mounting Technology=THT, Orientation=Vertical, Package Reference=61301021121, Packaging=Bag, Part Number=61301021121, Pin Number=10, Pitch=2.54mm, Publisher=WurthElektronik, Row Number=Dual
R1 R18 R19: library part CRCW0603470RJNEAHP, "RES SMD 470 OHM 5% 1/4W 0603", Device Package="0603 (1608 Metric)", Manufacturer="Vishay Dale", Operating Temperature="-55°C ~ 155°C", Power (Watts)="0.25W, 1/4W", Ratings=AEC-Q200, Resistance="470 Ohms", Supplier Device Package=0603, Supplier Part Number 1=3495224, Temperature Coefficient=±200ppm/°C, Tolerance=±5%, ComponentLink1Description=Datasheet, ComponentLink1URL=http://www.vishay.com/docs/20043/crcwhpe3.pdf, ComponentLink2Description="DigiKey Link", ComponentLink2URL=http://digikey.com/product-detail/en/vishay-dale/CRCW0603470RJNEAHP/541-470SACT-ND/2222809, Composition="Thick Film", Features="Automotive AEC-Q200, Pulse Withstanding", Height - Seated (Max)="0.022\" (0.55mm)", LastUpdated="02.09.2020 1:09:49", Lifecycle Status=Active, Minimum Order=1, Number of Terminations=2, Package / Case="0603 (1608 Metric)", Packaging=TapeAndReel, Part Number=CRCW0603470RJNEAHP, Part Status=Active, PartId=21320, Price=0.02, Series=CRCW-HP, Size / Dimension="0.063\" L x 0.033\" W (1.60mm x 0.85mm)", Supplier 1=Farnell
R2 R3 R4: library part RNCS0603BKE10K0, "RES 10K OHM 0.1% 1/16W 0603", Device Package="0603 (1608 Metric)", Manufacturer="Stackpole Electronics Inc", Operating Temperature="-55°C ~ 155°C", Power (Watts)="0.063W, 1/16W", Ratings=AEC-Q200, Resistance="10 kOhms", Supplier Device Package=0603, Supplier Part Number 1=RNCS0603BKE10K0CT-ND, Temperature Coefficient=±25ppm/°C, Tolerance=±0.1%, ComponentLink1Description=Datasheet, ComponentLink1URL=https://www.seielect.com/catalog/sei-rncs_rnch.pdf, ComponentLink2Description="DigiKey Link", ComponentLink2URL=http://digikey.com/product-detail/en/stackpole-electronics-inc/RNCS0603BKE10K0/RNCS0603BKE10K0CT-ND/1800113, Composition="Thin Film", Features="Anti-Corrosive, Automotive AEC-Q200, Moisture Resistant", Height - Seated (Max)="0.022\" (0.55mm)", LastUpdated="02.09.2020 1:10:25", Lifecycle Status=Active, Minimum Order=1, Number of Terminations=2, Package / Case="0603 (1608 Metric)", Packaging=TapeAndReel, Part Number=RNCS0603BKE10K0, Part Status=Active, PartId=4838, Price=0.08, Series=RNCS, Size / Dimension="0.061\" L x 0.031\" W (1.55mm x 0.80mm)", Supplier 1=DigiKey
R5 R6 R7 R8: library part RT0603FRE074K7L, "RES SMD 4.7K OHM 1% 1/10W 0603", Device Package="0603 (1608 Metric)", Manufacturer=Yageo, Operating Temperature="-55°C ~ 155°C", Power (Watts)="0.1W, 1/10W", Resistance="4.7 kOhms", Supplier Device Package=0603, Supplier Part Number 1=YAG1238CT-ND, Temperature Coefficient=±50ppm/°C, Tolerance=±1%, ComponentLink1Description=Datasheet, ComponentLink1URL=https://www.yageo.com/upload/media/product/productsearch/datasheet/rchip/PYu-RT_1-to-0.01_RoHS_L_11.pdf, ComponentLink2Description="DigiKey Link", ComponentLink2URL=http://digikey.com/product-detail/en/yageo/RT0603FRE074K7L/YAG1238CT-ND/4340591, Composition="Thin Film", Height - Seated (Max)="0.022\" (0.55mm)", LastUpdated="02.09.2020 1:10:23", Lifecycle Status=Active, Minimum Order=1, Number of Terminations=2, Package / Case="0603 (1608 Metric)", Packaging=TapeAndReel, Part Number=RT0603FRE074K7L, Part Status=Active, PartId=5678, Price=0.01, Series=RT, Size / Dimension="0.063\" L x 0.031\" W (1.60mm x 0.80mm)", Supplier 1=DigiKey
R9 R15: library part RMCF0603JT12K0, "RES 12K OHM 5% 1/10W 0603", Device Package="0603 (1608 Metric)", Manufacturer="Stackpole Electronics Inc", Operating Temperature="-55°C ~ 155°C", Power (Watts)="0.1W, 1/10W", Ratings=AEC-Q200, Supplier Device Package=0603, Supplier Part Number 1=RMCF0603JT12K0CT-ND, Temperature Coefficient=±200ppm/°C, Tolerance=±5%, ComponentLink1Description=Datasheet, ComponentLink1URL=https://www.seielect.com/catalog/sei-rmcf_rmcp.pdf, ComponentLink2Description="DigiKey Link", ComponentLink2URL=http://digikey.com/product-detail/en/stackpole-electronics-inc/RMCF0603JT12K0/RMCF0603JT12K0CT-ND/1943192, Composition="Thick Film", Features="Automotive AEC-Q200", Height - Seated (Max)="0.022\" (0.55mm)", LastUpdated="02.09.2020 1:10:24", Lifecycle Status=Active, Minimum Order=1, Number of Terminations=2, Package / Case="0603 (1608 Metric)", Packaging=CutTape, Part Number=RMCF0603JT12K0, Part Status=Active, PartId=5166, Price=0.10, Resistance="12 kOhms", Series=RMCF, Size / Dimension="0.061\" L x 0.031\" W (1.55mm x 0.80mm)", Supplier 1=DigiKey
R10: library part ERA-3AEB222V, "RES SMD 2.2K OHM 0.1% 1/10W 0603", Device Package="0603 (1608 Metric)", Manufacturer="Panasonic Electronic Components", Operating Temperature="-55°C ~ 155°C", Power (Watts)="0.1W, 1/10W", Ratings=AEC-Q200, Resistance="2.2 kOhms", Supplier Device Package=0603, Supplier Part Number 1=P2.2KDBCT-ND, Temperature Coefficient=±25ppm/°C, Tolerance=±0.1%, ComponentLink1Description=Datasheet, ComponentLink1URL=https://industrial.panasonic.com/cdbs/www-data/pdf/RDM0000/AOA0000C307.pdf, ComponentLink2Description="DigiKey Link", ComponentLink2URL=http://digikey.com/product-detail/en/panasonic-electronic-components/ERA-3AEB222V/P2.2KDBCT-ND/1466060, Composition="Thin Film", Features="Automotive AEC-Q200", Height - Seated (Max)="0.022\" (0.55mm)", LastUpdated="02.09.2020 1:10:23", Lifecycle Status=Active, Minimum Order=1, Number of Terminations=2, Package / Case="0603 (1608 Metric)", Packaging=TapeAndReel, Part Number=ERA-3AEB222V, Part Status=Active, PartId=5547, Price=0.04, Series=ERA-3A, Size / Dimension="0.063\" L x 0.031\" W (1.60mm x 0.80mm)", Supplier 1=DigiKey
R11 R12 R13: library part TLRZ1JTTD, "RES 0 OHM JUMPER 0603", Device Package="0603 (1608 Metric)", Manufacturer="KOA Speer Electronics, Inc.", Operating Temperature="-55°C ~ 170°C", Ratings=AEC-Q200, Supplier Device Package=0603, Supplier Part Number 1=2019-TLRZ1JTTDCT-ND, Tolerance=Jumper, ComponentLink1Description=Datasheet, ComponentLink1URL=http://www.koaspeer.com/catimages/Products/TLRZ/TLRZ.pdf, ComponentLink2Description="DigiKey Link", ComponentLink2URL=http://digikey.com/product-detail/en/koa-speer-electronics-inc/TLRZ1JTTD/2019-TLRZ1JTTDCT-ND/9847537, Composition="Metal Element", Features="Automotive AEC-Q200, Current Sense", Height - Seated (Max)="0.022\" (0.55mm)", LastUpdated="02.09.2020 1:10:25", Lifecycle Status=Active, Minimum Order=1, Number of Terminations=2, Package / Case="0603 (1608 Metric)", Packaging=TapeAndReel, Part Number=TLRZ1JTTD, Part Status=Active, PartId=4851, Price=0.08, Series=TLRZ, Size / Dimension="0.063\" L x 0.031\" W (1.60mm x 0.80mm)", Supplier 1=DigiKey
R14: library part ERA-3AEB222V, "RES SMD 2.2K OHM 0.1% 1/10W 0603", Device Package="0603 (1608 Metric)", Manufacturer="Panasonic Electronic Components", Operating Temperature="-55°C ~ 155°C", Power (Watts)="0.1W, 1/10W", Ratings=AEC-Q200, Supplier Device Package=0603, Supplier Part Number 1=P2.2KDBCT-ND, Temperature Coefficient=±25ppm/°C, Tolerance=±0.1%, ComponentLink1Description=Datasheet, ComponentLink1URL=https://industrial.panasonic.com/cdbs/www-data/pdf/RDM0000/AOA0000C307.pdf, ComponentLink2Description="DigiKey Link", ComponentLink2URL=http://digikey.com/product-detail/en/panasonic-electronic-components/ERA-3AEB222V/P2.2KDBCT-ND/1466060, Composition="Thin Film", Features="Automotive AEC-Q200", Height - Seated (Max)="0.022\" (0.55mm)", LastUpdated="02.09.2020 1:10:23", Lifecycle Status=Active, Minimum Order=1, Number of Terminations=2, Package / Case="0603 (1608 Metric)", Packaging=TapeAndReel, Part Number=ERA-3AEB222V, Part Status=Active, PartId=5547, Price=0.04, Resistance="2.2 kOhms", Series=ERA-3A, Size / Dimension="0.063\" L x 0.031\" W (1.60mm x 0.80mm)", Supplier 1=DigiKey
R16 R17: library part RMCF0603JT2K00, "RES 2K OHM 5% 1/10W 0603", Device Package="0603 (1608 Metric)", Manufacturer="Stackpole Electronics Inc", Operating Temperature="-55°C ~ 155°C", Power (Watts)="0.1W, 1/10W", Ratings=AEC-Q200, Resistance="2 kOhms", Supplier Device Package=0603, Supplier Part Number 1=RMCF0603JT2K00CT-ND, Temperature Coefficient=±200ppm/°C, Tolerance=±5%, ComponentLink1Description=Datasheet, ComponentLink1URL=https://www.seielect.com/catalog/sei-rmcf_rmcp.pdf, ComponentLink2Description="DigiKey Link", ComponentLink2URL=http://digikey.com/product-detail/en/stackpole-electronics-inc/RMCF0603JT2K00/RMCF0603JT2K00CT-ND/1943177, Composition="Thick Film", Features="Automotive AEC-Q200", Height - Seated (Max)="0.022\" (0.55mm)", LastUpdated="02.09.2020 1:10:22", Lifecycle Status=Active, Minimum Order=1, Number of Terminations=2, Package / Case="0603 (1608 Metric)", Packaging=CutTape, Part Number=RMCF0603JT2K00, Part Status=Active, PartId=5994, Price=0.10, Series=RMCF, Size / Dimension="0.061\" L x 0.031\" W (1.55mm x 0.80mm)", Supplier 1=DigiKey
R20 R21 R22: library part CRCW0603470RJNEAHP, "RES SMD 470 OHM 5% 1/4W 0603", Device Package="0603 (1608 Metric)", Manufacturer="Vishay Dale", Operating Temperature="-55°C ~ 155°C", Power (Watts)="0.25W, 1/4W", Ratings=AEC-Q200, Supplier Device Package=0603, Supplier Part Number 1=541-470SACT-ND, Temperature Coefficient=±200ppm/°C, Tolerance=±5%, ComponentLink1Description=Datasheet, ComponentLink1URL=http://www.vishay.com/docs/20043/crcwhpe3.pdf, ComponentLink2Description="DigiKey Link", ComponentLink2URL=http://digikey.com/product-detail/en/vishay-dale/CRCW0603470RJNEAHP/541-470SACT-ND/2222809, Composition="Thick Film", Features="Automotive AEC-Q200, Pulse Withstanding", Height - Seated (Max)="0.022\" (0.55mm)", LastUpdated="02.09.2020 1:09:49", Lifecycle Status=Active, Minimum Order=1, Number of Terminations=2, Package / Case="0603 (1608 Metric)", Packaging=TapeAndReel, Part Number=CRCW0603470RJNEAHP, Part Status=Active, PartId=21320, Price=0.02, Resistance="470 Ohms", Series=CRCW-HP, Size / Dimension="0.063\" L x 0.033\" W (1.60mm x 0.85mm)", Supplier 1=DigiKey
S1 S2 S3: "Switch", Manufacturer_Name=E-Switch, Mouser Part Number=612-LL3301NF065QG, Datasheet Link=http://spec_sheets.e-switch.com/specs/P090002.pdf, Height=4mm, Manufacturer_Part_Number=LL3301NF065QG, Mouser Price/Stock=https://www.mouser.co.uk/ProductDetail/E-Switch/LL3301NF065QG/?qs=QtyuwXswaQiWhwgY68YTTw%3D%3D
U1: library part CMP-0162-00111-1, "2K, 256x8 or 128x16-bit, 2.5V Microwire Serial EEPROM, 8-Pin SOIC 150mil, Industrial Temperature", Code_IPC=SOIC127P600-8, Code_JEDEC=MS-012, ComponentAvailability="Unknown. Contact manufacturer to determine status.", DatasheetVersion="revF, May-2008", PackageDescription="8-Lead Plastic Small Outline (SN) - Narrow, 3.90mm Body [SOIC]", PackageReference=SOIC-SN8, PackageVersion="revBB, Aug-2009"
U2: "Integrated Circuit", Manufacturer_Name="ON Semiconductor", Mouser Part Number=863-NCP1117DT33T5G, Arrow Part Number=NCP1117DT33T5G, Arrow Price/Stock=https://www.arrow.com/en/products/ncp1117dt33t5g/on-semiconductor, Datasheet Link=http://www.onsemi.com/pub/Collateral/NCP1117-D.PDF, Height=2.38mm, Manufacturer_Part_Number=NCP1117DT33T5G, Mouser Price/Stock=https://www.mouser.co.uk/ProductDetail/ON-Semiconductor/NCP1117DT33T5G/?qs=Gev%252BmEvV0ibY9yFNc3ZYyw%3D%3D
X1: library part CMP-0277-00003-1, "Ceramic Surface Mount Low Profile Quartz Crystal, 8 MHz, -20 to 70 degC, 4-Pin 6 x 3.6 x 1.2 mm SMD, RoHS, 1000pcs / Reel", Frequency="8 MHz", Load Capacitance CL="18 pF Typ.", Manufacturer=Abracon, PartNumber=ABMM2-8.000MHZ-E2-T, Shunt Capacitance C0="7 pF Max.", Temperature Range="-20 to 70 degC", ComponentLink1Description="Manufacturer URL", ComponentLink1URL=http://www.abracon.com/, ComponentLink2Description=Datasheet, ComponentLink2URL=http://www.abracon.com/Resonators/ABMM2.pdf, ComponentLink3Description="Package Specification", ComponentLink3URL=http://www.abracon.com/Resonators/ABMM2.pdf, DatasheetVersion=Jan-13, ESR="72 Ohm Max.", Mounting Technology="Surface Mount", PackageDescription="4-Pin SMD, Body 6 x 3.6 mm, Pitch 4.4 mm", Packing="1000pcs / Reel", RoHS=TRUE

## Via types
v1: diameter 0.6, hole 0.3, Top Layer to Bottom Layer, 144 vias

## Nets (pads, with @x,y where several pads share a name; then routed paths per layer and width w, separated by ;. In a path a pad name is that pad's centre, name@x,y a point inside that pad or via, vN(x,y) a via of type N, cw(c..) or ccw(c..) an arc to the next point about the centre after c; other vN are vias at no path point)
3V3: C20.1 C23.2 C24.2 C25.2 C26.2 C27.2 C32.1 FB1.1 FB2.1 IC2.20 IC2.31 IC2.42 IC2.50 IC2.56 J1.4 J2.1 J2.2 J2.3 J3.1 J4.1 J6.1 J7.1 J8.1 R2.2 R3.2 R4.2 R14.1 U1.6 U1.8 U2.4 | length 51.3
  Top Layer w0.2: v1(32.639,48.133) 33.286,48.78 IC2.42@34.38,48.78 ; U1.6@33.147,29.273 33.157,29.263 33.157,28.184 33.528,27.813 35.941,27.813 ; U1.8@35.687,29.273 35.687,28.067 35.941,27.813 ; IC2.50@36.755,43.905 36.765,43.895 36.765,42.991 37.397,42.359 v1(38.322,42.359) 38.379,42.416 39.241,42.416 39.755,42.93 IC2.56@39.755,43.905 ; IC2.31@36.755,55.155 36.755,53.923 37.338,53.34 v1(39.243,53.34) 41.402,53.34 42.255,54.193 IC2.20@42.255,55.155 ; R4.2@39.512,33.02 39.639,33.147 R3.2@39.639,34.798 v1(39.639,36.18) ; R2.2@39.766,30.734 39.664,30.632 C20.1@39.664,28.752 ; v1(41.402,28.575) 39.791,28.575 C20.1@39.664,28.702 C20.1@39.664,28.752 ; U2.4@50.753,78.887 U2.4@51.368,79.502 ; 35.941,27.813 36.449,27.813 37.352,28.716 37.352,29.115 37.74,29.502 38.914,29.502 C20.1@39.664,28.752
  Top Layer w0.6: C32.1@50.753,75.057 U2.4@50.753,78.887
  Bottom Layer w0.2: C23.2@47.956,39.41 C23.2@48.006,39.41 ; R14.1@53.594,51.42 55.103,51.42 v1(55.753,52.07) ; v1(55.245,42.926) FB1.1@55.245,44.537 ; FB2.1@55.245,47.585 56.475,47.585 v1(56.515,47.625)
  Bottom Layer w0.3: C27.2@41.91,39.41 C26.2@43.434,39.41 C25.2@44.958,39.41 C24.2@46.482,39.41 47.956,39.41 v1(47.956,41.225)
  other v1: 49.276,77.724 50.419,77.724 51.562,77.724 52.705,77.724 50.419,79.375 49.276,79.438 51.562,79.502 52.705,79.502 49.276,81.153 50.419,81.153 51.562,81.153 52.705,81.153
ARD_VIN: J1.8 J5.2 | length 33.6
  Top Layer w0.4: J5.2@57.023,82.423 58.166,83.566 84.528,83.566 J1.8@88.519,79.575
CSSPIN: IC1.16 IC3.7 J1.25 | length 76.2
  Top Layer w0.2: v1(79.502,50.165) 80.587,50.165 83.055,52.633 IC1.16@83.827,52.633
  Bottom Layer w0.2: v1(79.502,50.165) 78.613,49.276 78.613,40.894 77.089,39.37 77.089,30.099 78.467,28.721 102.228,28.721 103.886,30.379 103.886,31.351 104.286,31.751 104.286,36.55 105.156,37.42 105.156,38.512 104.909,38.759 104.846,38.759 104.069,39.536 103.5,39.536 97.659,33.695 J1.25@97.659,30.988
DONE: IC1.54 P3.6 | length 24.3
  Top Layer w0.2: IC1.54@93.727,60.133 93.744,60.15 94.567,60.15 108.562,74.145 P3.6@112.268,74.145
FTDI_VREGIN: C28.2 C29.2 IC2.12 IC2.37 IC2.49 IC2.64 | length 31.4
  Top Layer w0.2: IC2.37@34.38,51.28 35.652,51.28 38.604,48.328 ; IC2.49@36.255,43.905 36.255,45.653 37.465,46.863 v1(38.354,46.863) 40.069,46.863 ; IC2.64@43.755,43.905 43.755,45.78 42.672,46.863 40.069,46.863 ; IC2.12@45.63,51.28 40.358,51.28 38.604,49.526 38.604,48.328 ; 38.604,48.328 40.069,46.863
  Bottom Layer w0.2: C29.2@36.703,48.093 C28.2@38.354,48.093 v1(38.354,46.863)
GND: C1.1 C2.1 C3.1 C4.1 C5.1 C6.1 C7.1 C8.1 C9.1 C10.1 C11.1 C12.1 C13.1 C14.1 C15.1 C16.1 C17.1 C18.1 C19.1 C20.2 C21.1 C22.1 C23.1 C24.1 C25.1 C26.1 C27.1 C28.1 C29.1 C30.1 C31.1 C32.2 IC1.73 IC2.1 IC2.5 IC2.10 IC2.11 IC2.13 IC2.15 IC2.25 IC2.35 IC2.47 IC2.51 IC3.10 J1.6 J1.7 J1.29 J2.9 J2.10 J2.15 J2.16 P1.5 P1.SH1 P1.SH2 P1.SH3 P1.SH4 P1.SH5 P1.SH6 P2.3 P2.5 P2.7 P2.9 P3.1 R10.1 R15.1 S1.4 S2.4 S3.4 U1.5 U2.1 X1.2 X1.4 | length 166.5
  Top Layer w0.2: P1.SH3@31.623,72.509 P1.SH3@32.073,72.058 ; v1(31.75,45.974) 31.858,45.974 32.164,46.28 IC2.47@34.38,46.28 ; U1.5@31.877,29.273 31.877,28.067 32.531,27.413 36.874,27.413 37.084,27.623 37.285,27.623 38.314,28.652 C20.2@38.314,28.702 ; P1.SH1@33.909,72.136 33.831,72.058 P1.SH1@33.923,72.058 ; IC2.35@34.38,52.28 36.322,52.28 v1@36.366,52.324 ; IC2.51@37.255,43.905 37.255,45.129 37.858,45.732 38.62,45.732 v1@38.735,45.847 ; v1(39.624,57.277) 39.745,57.156 39.745,55.165 IC2.25@39.755,55.155 ; IC2.1@45.63,45.78 44.517,45.78 43.036,47.261 43.036,47.773 ; IC2.5@45.63,47.78 45.623,47.773 43.036,47.773 ; IC2.11@45.63,50.78 46.729,50.78 46.846,50.663 46.846,50.397 46.729,50.28 IC2.10@45.63,50.28 42.787,50.28 v1(41.719,49.212) 41.719,49.089 43.036,47.773 ; IC2.13@45.63,51.78 42.581,51.78 41.939,52.422 v1(41.939,52.505) 41.939,52.588 42.131,52.78 IC2.15@45.63,52.78 ; v1@46.99,31.369 v1(47.01,31.349) 48.494,31.349 C21.1@48.514,31.329 48.564,31.329 48.564,30.303 49.276,29.591 50.194,29.591 X1.4@50.235,29.55 50.235,29.75 52.635,32.15 X1.2@52.635,33.95 52.721,34.036 53.858,34.036 54.61,33.284 C22.1@54.61,32.425 ; v1(120.269,71.12) C15.1@120.269,73.112 120.319,73.112 121.019,72.412 S1.4@122.845,72.412 ; v1(121.793,39.243) 123.78,39.243 127.345,42.808 127.345,46.743 126.345,47.743 126.345,51.905 127.345,52.905 S3.4@127.345,58.017
  Top Layer w0.4: v1(31.623,64.262) P1.SH6@31.623,66.683 ; v1(31.623,75.184) P1.SH3@31.623,72.509 P1.SH4@31.623,70.433 P1.SH5@31.623,68.759 P1.SH6@31.623,66.683 ; P1.SH3@32.073,72.058 P1.SH1@33.831,72.058 ; P1.SH2@33.473,66.683 P1.SH6@31.623,66.683 ; P1.5@34.283,68.296 35.717,68.296 v1(36.322,67.691)
  Top Layer w0.5: U2.1@44.614,81.788 U2.1@44.618,81.792
  Top Layer w0.6: C31.1@38.862,77.51 v1(38.862,78.994) ; v1(41.783,81.788) U2.1@44.614,81.788 ; v1(47.752,75.057) C32.2@49.403,75.057
  Bottom Layer w0.2: v1@36.322,52.237 v1(36.322,52.324) ; C29.1@36.703,49.403 38.444,49.403 38.404,49.443 C28.1@38.354,49.443 38.481,49.57 v1(38.481,51.308) ; v1@39.459,57.442 v1(39.624,57.277) ; v1@50.546,47.625 v1(50.586,47.585) C19.1@51.943,47.585 C18.1@53.594,47.585 C18.1@53.944,47.235 ; R15.1@51.816,51.42 51.866,51.42 52.994,50.292 v1(55.499,50.292) ; v1(52.324,42.926) 51.816,43.434 C17.1@51.816,44.537 C16.1@53.594,44.537 C16.1@53.644,44.537 ; v1(75.819,55.199) v1@75.917,55.199 ; C3.1@83.058,68.533 C3.1@83.185,68.66 ; C13.1@84.542,44.196 C13.1@84.582,44.156 ; C12.1@86.106,44.156 C12.1@86.131,44.131 ; IC3.10@105.156,47.07 v1(105.156,49.53) ; C30.1@115.316,39.664 115.53,39.878 116.165,39.243 v1(121.793,39.243)
  Bottom Layer w0.3: v1(41.91,36.195) C27.1@41.91,38.06 C26.1@43.434,38.06 C25.1@44.958,38.06 C24.1@46.482,38.06 C23.1@48.006,38.06 ; R10.1@57.516,63.246 57.531,63.261 57.531,64.786 58.039,65.294 P2.3@58.039,65.659 ; v1@104.648,58.801 v1(104.712,58.864)
  Bottom Layer w0.4: v1@75.917,55.199 76.506,54.61 C9.1@77.43,54.61 C10.1@77.43,52.959 ; v1(81.28,44.196) C13.1@84.542,44.196 ; C4.1@81.407,68.533 C3.1@83.058,68.533 C2.1@84.709,68.533 C1.1@86.487,68.533 ; C3.1@83.185,68.66 v1(83.185,70.358) ; C13.1@84.582,44.156 C12.1@86.106,44.156 ; C12.1@86.131,44.131 C11.1@87.971,44.131
  Bottom Layer w0.5: C5.1@102.275,63.881 C6.1@102.275,62.103 C8.1@102.275,60.452 C7.1@102.275,58.801 v1@104.648,58.801
  other v1: 37.084,27.432 38.665,45.847 86.741,53.721 88.392,53.721 89.916,53.721 91.313,53.721 86.741,55.245 88.392,55.245 89.916,55.245 91.313,55.245 86.741,56.642 88.392,56.642 89.916,56.642 91.313,56.642 86.741,58.166 88.392,58.166 89.916,58.166 91.313,58.166
INITN: IC1.55 P3.8 | length 25.8
  Top Layer w0.2: IC1.55@93.027,60.833 94.615,60.833 110.467,76.685 P3.8@112.268,76.685
NetC16_2: C16.2 C17.2 FB1.2 IC2.4 | length 11.2
  Top Layer w0.2: IC2.4@45.63,47.28 46.902,47.28 48.716,45.466 v1@49.911,45.466
  Bottom Layer w0.2: v1(49.784,45.593) 50.165,45.974 C17.2@51.816,45.974 ; C17.2@51.816,45.887 51.903,45.974 53.507,45.974 C16.2@53.594,45.887 ; C16.2@53.594,45.974 55.158,45.974 FB1.2@55.245,45.887 FB1.2@54.951,45.593
NetC18_2: C18.2 C19.2 FB2.2 IC2.9 | length 10.9
  Top Layer w0.2: IC2.9@45.63,49.78 48.002,49.78 v1(49.149,50.927)
  Bottom Layer w0.2: v1(49.149,50.927) 51.141,48.935 51.893,48.935 C19.2@51.943,48.935 C18.2@53.594,48.935 FB2.2@55.245,48.935
NetC21_2: C21.2 IC2.2 X1.3 | length 17.4
  Top Layer w0.2: IC2.2@45.94,46.27 46.694,46.27 50.235,42.729 X1.3@50.235,33.95 48.809,33.95 48.514,33.655 C21.2@48.514,32.679
NetD1_1: D1.1 R20.2 | length 1.9
  Top Layer w0.2: D1.1@124.575,67.056 R20.2@126.492,67.056
NetD2_1: D2.1 R21.2 | length 1.9
  Top Layer w0.2: D2.1@124.563,65.151 R21.2@126.492,65.151
NetD3_1: D3.1 R22.2 | length 1.9
  Top Layer w0.2: D3.1@124.575,63.373 R22.2@126.477,63.373